# Altium PCB 28Pin_PCB.PcbDoc (part 1 of 2)
Units mm, origin at the board's own origin, x right, y up, seen from the top; angles counter-clockwise.
Board outline 68.58 x 53.34 mm, 2 copper layers (Top Layer, Bottom Layer); 103 components, 71 nets, 321 pads, 0 vias.
Unrouted connection lines stored in the file: 209.
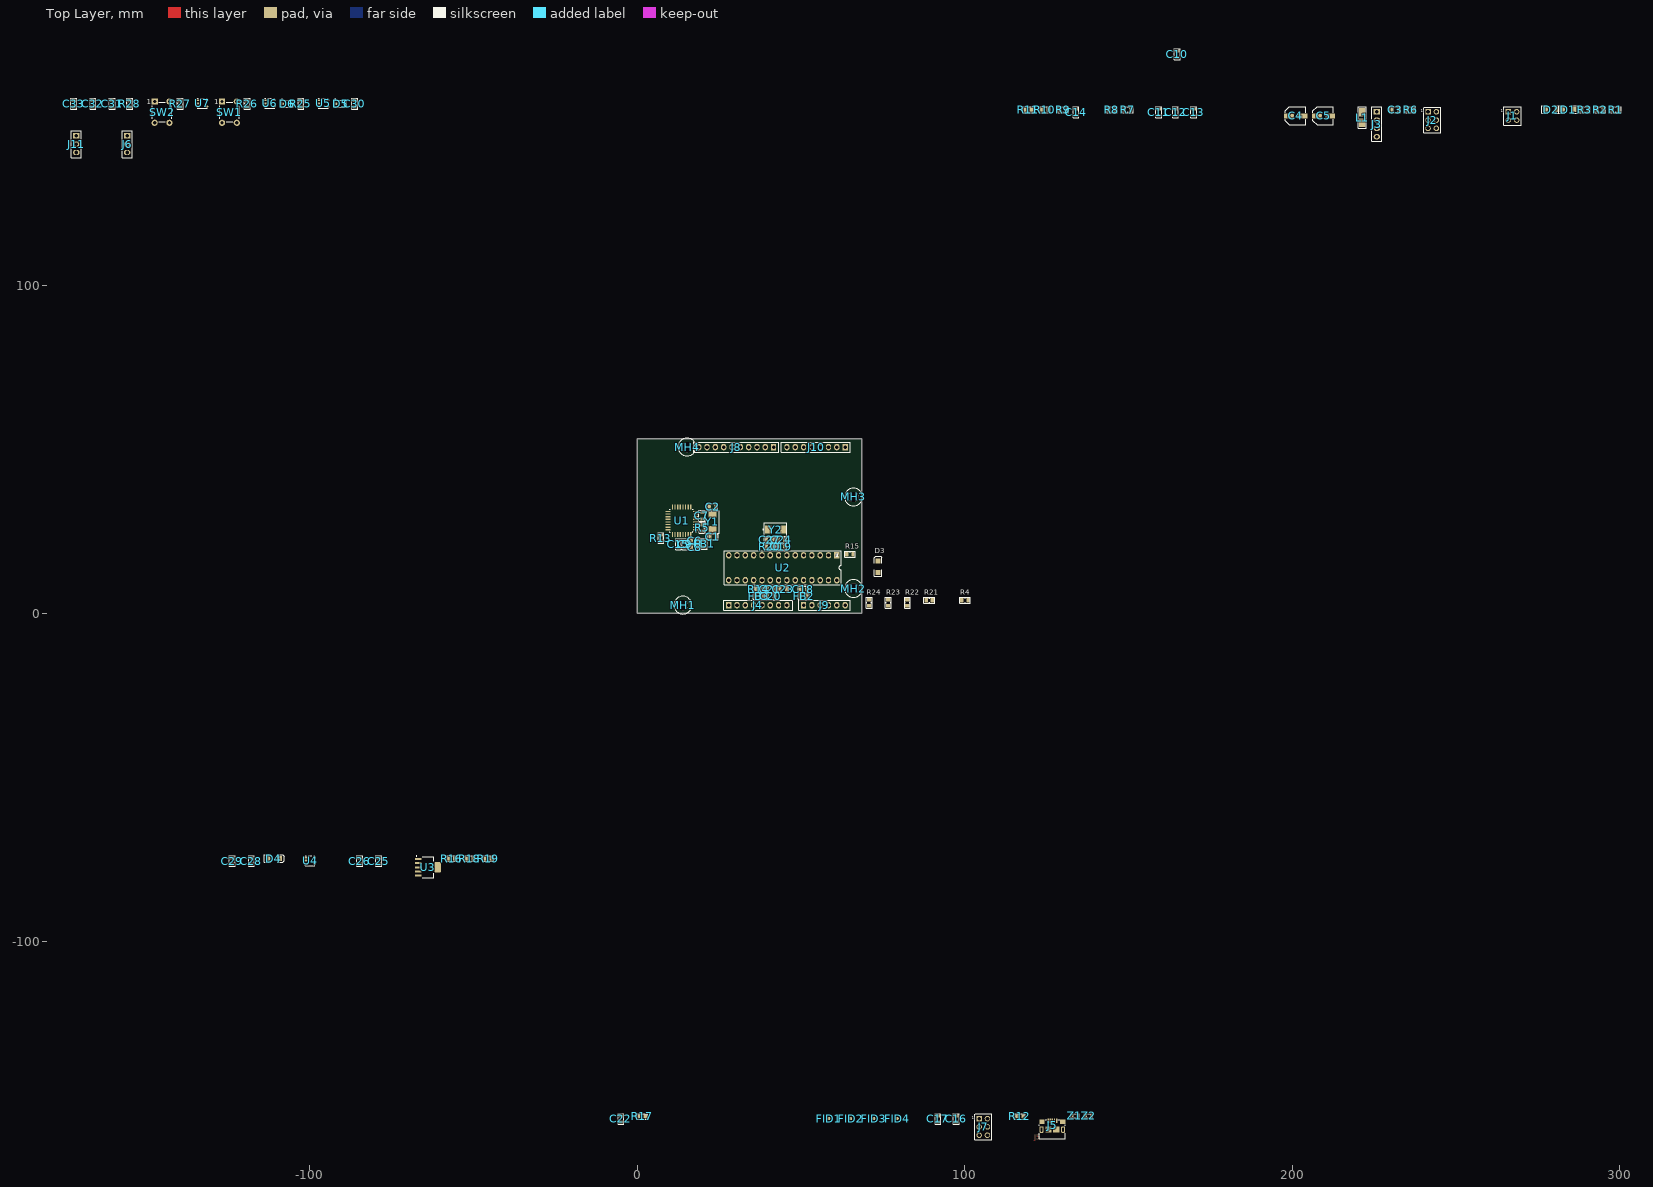
[diagram p0: Top Layer view]
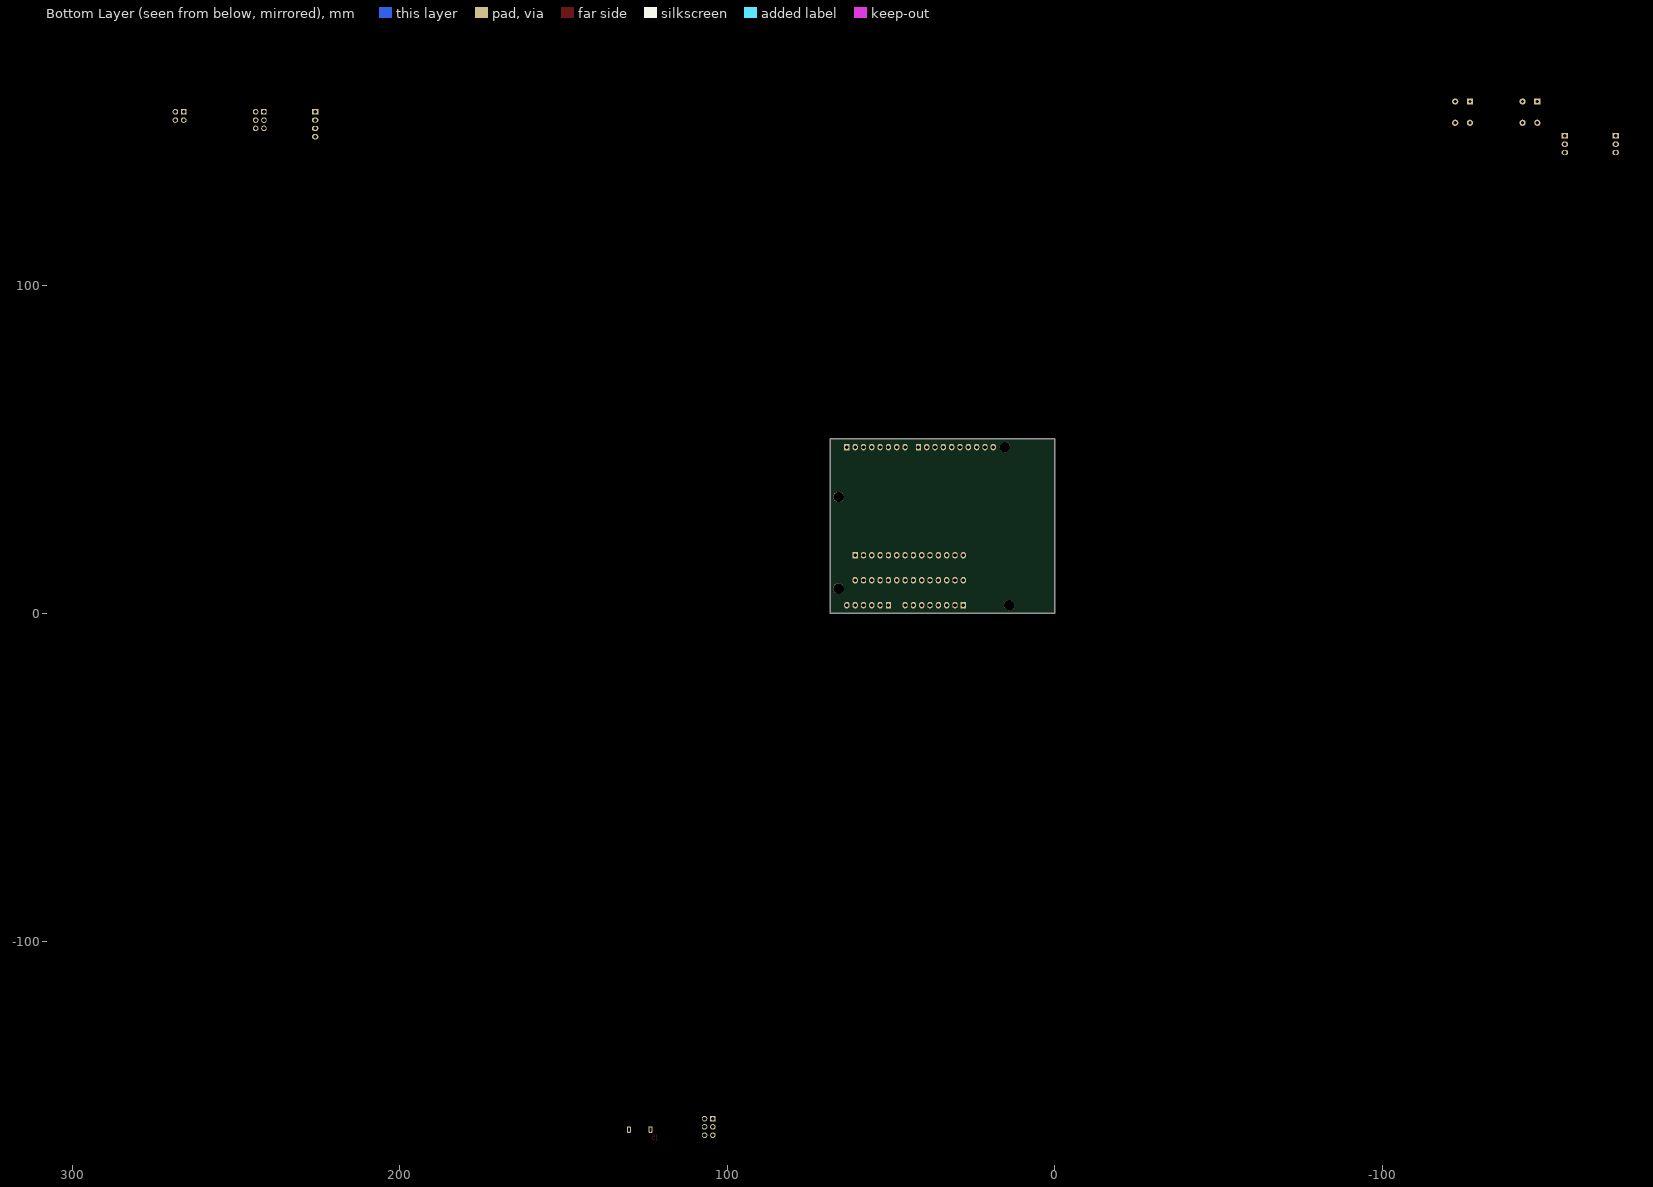
[diagram p1: Bottom Layer view, seen from below]

## Layer stack, top to bottom
Top Solder: solder mask 0.0102, Solder Resist, Dk 3.5
Top Layer: signal copper 0.0356
Dielectric 1: dielectric 0.32, FR-4, Dk 4.8
Bottom Layer: signal copper 0.0356
Bottom Solder: solder mask 0.0102, Solder Resist, Dk 3.5

## Board outline
0,0 68.58,0 68.58,53.34 0,53.34

## Design rules (kind name [scope] priority, off if disabled: settings)
Clearance [All] p1: gap=0.254 ignorepadtopadclearanceinfootprint=FALSE except(0: Arc-Hole Track-Hole SMDPad-Hole THPad-Hole Via-Hole Fill-Hole Poly-Hole Region-Hole Text-Hole)
PolygonConnect [All] p1: connectstyle=Relief reliefconductorwidth=0.254 reliefentries=4 polygonreliefangle="90 Angle" airgapwidth=0.254
RoutingVias [All] p1: holewidth=0.711 width=1.27 viastyle="Through Hole" minholewidth=0.711 minwidth=1.27 maxholewidth=0.711 maxwidth=1.27
SolderMaskExpansion [All] p1: expansion=0.102 istentingtop=FALSE
Width [All] p1: maxlimit=0.254 minlimit=0.254 preferedwidth=0.254
30 further rules are at their usual default settings.

## Components (designator, comment, footprint, x,y, rotation, side; value= is the part's Value field where it differs from the comment)
C1 "18pF 50V" C0805 23.14,23.37 r0 top
C2 "18pF 50V" C0805 23.01,32.58 r0 top
C3 "CER 0.1uF 0805" C0805 231.394,153.797 r0 top
C4 "100uF 10V" C_ALUMINIUM_100u 201.041,151.892 r0 top
C5 "100uF 10V" C_ALUMINIUM_100u 209.55,151.892 r0 top
C6 "CER 0.1uF 0805" C0805 17.6,22.22 r0 top
C7 "CER 0.1uF 0805" C0805 19.76,29.8 r270 top
C8 "CAP 10uF 16V" C0805_10uF 17.6,20.16 r0 top
C9 "CER 0.1uF 0805" C0805 14.72,21.15 r90 top
C10 "CER 0.1uF 0805" C0805 164.846,170.688 r90 top
C11 "CER 0.1uF 0805" C0805 159.258,153.035 r90 top
C12 "CER 0.1uF 0805" C0805 164.338,153.035 r90 top
C13 "CAP 10uF 16V" C0805_10uF 169.926,153.035 r90 top
C14 "CER 0.1uF 0805" C0805 133.985,153.035 r90 top
C15 "1uF CER" C0805 12.62,21.14 r90 top
C16 "CER 0.1uF 0805" C0805 97.409,-154.305 r90 top
C17 "CAP 10uF 16V" C0805_10uF 91.821,-154.305 r90 top
C18 "CAP 10uF 16V" C0805_10uF 50.78,7.35 r0 top
C19 "CER 0.1uF 0805" C0805 44.04,20.42 r0 top
C20 "CAP 10uF 16V" C0805_10uF 40.76,5.28 r180 top
C21 "CER 0.1uF 0805" C0805 40.7,7.36 r180 top
C22 "CER 0.1uF 0805" C0805 -4.953,-154.305 r90 top
C23 "CER 0.1uF 0805" C0805 44.61,7.36 r180 top
C24 "18pF 50V" C0805 44.05,22.48 r180 top
C25 "CAP 10uF 16V" C0805_10uF -78.867,-75.565 r90 top
C26 "CAP 10uF 16V" C0805_10uF -84.709,-75.565 r90 top
C27 "18pF 50V" C0805 40.43,22.45 r180 top
C28 "CER 0.1uF 0805" C0805 -117.729,-75.565 r90 top
C29 "CER 0.1uF 0805" C0805 -123.571,-75.565 r90 top
C30 "CER 0.1uF 0805" C0805 -86.233,155.575 r90 top
C31 "CER 0.1uF 0805" C0805 -160.274,155.575 r90 top
C32 "CER 0.1uF 0805" C0805 -166.116,155.575 r90 top
C33 "CER 0.1uF 0805" C0805 -171.958,155.575 r90 top
D1 "LED2" 3.2X1.6X1.1 284.226,153.797 r0 top
D2 "LED2" 3.2X1.6X1.1 279.019,153.797 r0 top
D3 "LED2" 3.2X1.6X1.1 73.56,14.31 r90 top
D4 "LED2" 3.2X1.6X1.1 -110.871,-74.803 r0 top
D5 "BAT54HT1G" SOD323_DIODE -90.551,155.575 r0 top
D6 "BAT54HT1G" SOD323_DIODE -106.807,155.575 r0 top
FB1 "MPZ2012S601AT000" C0805 20.47,21.26 r90 top
FB2 "MPZ2012S601AT000" C0805 50.83,5.3 r0 top
FB3 "MPZ2012S601AT000" C0805 37.14,5.23 r0 top
FID1 "FID_1MMC" FID_40x120MM 58.547,-154.178 r0 top
FID2 "FID_1MMC" FID_40x120MM 65.151,-154.178 r90 top
FID3 "FID_1MMC" FID_40x120MM 72.263,-154.178 r90 top
FID4 "FID_1MMC" FID_40x120MM 79.375,-154.178 r90 top
J1 "HDR 2x2" HDR_2x2_2.54MM 267.208,150.622 r0 top
J2 "HDR 2x3" HDR_2x3_2.54MM 242.697,150.622 r0 top
J3 "HDR_MALE_1x4" HDR_MALE_1x4 225.806,153.162 r0 top
J4 "HDR FEMALE 1x8" HDR_FEMALE_1x8 27.94,2.54 r90 top locked
J5 "10118193-0001LF" USB_micro 126.746,-156.21 r0 top
J6 "MALE_HDR_1x3" HDR_MALE_1x3 -155.702,145.796 r0 top
J7 "HDR 2x3" HDR_2x3_2.54MM 105.664,-156.718 r0 top
J8 "HDR FEMALE 1x10 2.54mm" HDR_FEMALE_1x10 41.656,50.8 r270 top locked
J9 "HDR FEMALE 1x6" HDR_FEMALE_1x6 50.8,2.54 r90 top locked
J10 "HDR FEMALE 1x8" HDR_FEMALE_1x8 63.5,50.8 r270 top locked
J11 "MALE_HDR_1x3" HDR_MALE_1x3 -171.196,145.796 r0 top
L1 "2u2 / 2A" CL10INDUCTOR 221.361,151.384 r90 top
MH1 "MH_7.4_3.3MM" MH_7.4MM_3.2MMDRILL_NOPT 13.97,2.54 r0 top locked
MH2 "MH_7.4_3.3MM" MH_7.4MM_3.2MMDRILL_NOPT 66.04,7.62 r0 top locked
MH3 "MH_7.4_3.3MM" MH_7.4MM_3.2MMDRILL_NOPT 66.04,35.56 r0 top locked
MH4 "MH_7.4_3.3MM" MH_7.4MM_3.2MMDRILL_NOPT 15.24,50.8 r0 top locked
R1 "100K" RESC2012X65N 298.704,153.797 r0 top
R2 "560R 0805" RESC2012X65N 294.005,153.797 r0 top
R3 "560R 0805" RESC2012X65N 289.306,153.797 r0 top
R4 "10K" RESC2012X65N 100.075,4.036 r0 top
R5 "1MOhm" RESC2012X65N 19.8,26.13 r270 top
R6 "22R" RESC2012X65N 236.093,153.797 r0 top
R7 "22R" RESC2012X65N 149.733,153.797 r0 top
R8 "1K" RESC2012X65N 144.907,153.797 r0 top
R9 "0R" RESC2012X65N 130.048,153.797 r0 top
R10 "22R" RESC2012X65N 124.46,153.797 r0 top
R11 "1K" RESC2012X65N 119.38,153.797 r0 top
R12 "1K" RESC2012X65N 116.84,-153.543 r0 top
R13 "0R" RESC2012X65N 7.26,23.03 r90 top
R14 "22R" RESC2012X65N 37.14,7.33 r180 top
R15 "10K" RESC2012X65N 64.97,18.04 r0 top
R16 "560R 0805" RESC2012X65N -56.642,-74.803 r0 top
R17 "560R 0805" RESC2012X65N 1.524,-153.543 r0 top
R18 "0R" RESC2012X65N -51.054,-74.803 r0 top
R19 "0R" RESC2012X65N -45.466,-74.803 r0 top
R20 "1MOhm" RESC2012X65N 40.45,20.44 r0 top
R21 "10K" RESC2012X65N 89.155,4.036 r0 top
R22 "10K" RESC2012X65N 82.525,3.276 r90 top
R23 "10K" RESC2012X65N 76.675,3.276 r90 top
R24 "10K" RESC2012X65N 70.825,3.276 r90 top
R25 "560R 0805" RESC2012X65N -102.616,155.575 r90 top
R26 "22R" RESC2012X65N -118.999,155.575 r90 top
R27 "22R" RESC2012X65N -139.446,155.575 r90 top
R28 "22R" RESC2012X65N -154.94,155.575 r90 top
SW1 "1825910-6" "SW_ 1825910-6" -124.46,153.035 r0 top
SW2 "1825910-6" "SW_ 1825910-6" -145.034,153.035 r0 top
U1 "ATMEGA16U2-AU" TQFP32 13.58,28.34 r180 top
U2 "ATMEGA328P-PU" DIP28_328P 60.96,17.78 r270 top locked
U3 "TL1963A-33DCQR" SOT127P706X180-6N -63.881,-77.47 r0 top
U4 "SN74AHC1G09DBVR" DBV_SOP_23_5 -99.822,-75.438 r0 top
U5 "SN74AHC1G09DBVR" DBV_SOP_23_5 -95.758,155.702 r0 top
U6 "SN74AHC1G09DBVR" DBV_SOP_23_5 -112.141,155.702 r0 top
U7 "SN74AHC1G09DBVR" DBV_SOP_23_5 -132.715,155.702 r0 top
Y1 "ECS-160-S-23A-EN-TR" CRYSTAL_16MHz 22.85,28.12 r270 top
Y2 "ECS-160-S-23A-EN-TR" XTAL_ECS-160-S-23A-EN-TR 42.24,25.62 r0 top
Z1 "CG0603MLU-05E" R0603 133.604,-153.289 r0 top
Z2 "CG0603MLU-05E" R0603 137.795,-153.289 r0 top

## Footprints (in the part's own frame and the unit in brackets; to place one, negate y for a bottom-side part, rotate by r counter-clockwise, add the part's x,y. Pads: shape width x height; smd on the part's side, far side on the other; paste and mask are expansions set on the pad)
3.2X1.6X1.1 [mm] "SMT LED; 2 Flat Leads"
  rect 1.5x1.5 smd: 1(-1.75,0) 2(1.75,0)
  silkscreen extent -2.9,-1.15 3.2,1.15
C0805 [mm]
  rect 0.9x1.3 smd: 1(-0.95,0) 2(0.95,0)
  silkscreen extent -1.65,-0.89 1.65,0.89, body extent -0.98,-0.6 1.02,0.6, height 0.96
C0805_10uF [mm]
  rect 0.9x1.3 smd: 1(-0.95,0) 2(0.95,0)
  silkscreen extent -1.65,-0.89 1.65,0.89, body extent -1.05,-0.65 0.95,0.55, height 1.46
C_ALUMINIUM_100u [mm]
  rect 3x1.6 smd: 1(-2.05,0) 2(2.05,0)
  silkscreen extent -3.25,-2.75 3,2.75, body extent -3.15,-2.55 2.75,2.75, height 5.41
CL10INDUCTOR [mm]
  rect 2.7x2 smd: 1(-1.6,0) 2(1.6,0)
  silkscreen extent -3.25,-1.25 3.25,1.25, body extent -1.95,-1.2 1.45,1.5, height 2.67
CRYSTAL_16MHz [mm]
  rect 1.9x2.4 smd: 1(-2.123,0.147) 2(2.377,0.147)
  silkscreen extent -3.78,-1.89 3.56,2.18, body extent -2.87,-1.6 3.13,1.9, height 1.11
DBV_SOP_23_5 [mm]
  rect 1x0.55 smd: 1(-1.35,0.95)
  oval 1x0.55 smd: 2(-1.35,0) 3(-1.35,-0.95) 4(1.35,-0.95) 5(1.35,0.95)
  silkscreen extent -1.55,-1.55 1.45,1.55, body extent -1.45,-1.46 1.35,1.44, height 1.44
DIP28_328P [mm]
  rect 2x1.6 hole 1.1: 1(0,0)
  oval 2x1.6 hole 1.1: 2(0,-2.54) 3(0,-5.08) 4(0,-7.62) 5(0,-10.16) 6(0,-12.7) 7(0,-15.24) 8(0,-17.78) 9(0,-20.32) 10(0,-22.86) 11(0,-25.4) 12(0,-27.94) 13(0,-30.48) 14(0,-33.02) 15(7.62,-33.02) 16(7.62,-30.48) 17(7.62,-27.94) 18(7.62,-25.4) 19(7.62,-22.86) 20(7.62,-20.32) 21(7.62,-17.78) 22(7.62,-15.24) 23(7.62,-12.7) 24(7.62,-10.16) 25(7.62,-7.62) 26(7.62,-5.08) 27(7.62,-2.54) 28(7.62,0)
  Bottom Layer circle w0.254: c0,0 r0.597
  silkscreen extent -1.39,-34.31 9.01,1.27, body extent -0.15,-34.42 7.72,1.52, height 4.65
FID_40x120MM [mil]
  round 40 smd paste-40 mask+40: 1(0,0)
HDR_2x2_2.54MM [mm]
  rect 1.7x1.7 hole 1.1: 1(-1.27,2.54)
  round 1.7 hole 1.1: 2(1.27,2.54) 3(-1.27,0) 4(1.27,0)
  silkscreen extent -2.67,-1.52 2.67,4.06, body extent -2.54,-1.27 2.54,3.81, height 8.05
HDR_2x3_2.54MM [mm]
  rect 1.7x1.7 hole 1.1: 1(-1.27,2.54)
  round 1.7 hole 1.1: 2(1.27,2.54) 3(-1.27,0) 4(1.27,0) 5(-1.27,-2.54) 6(1.27,-2.54)
  silkscreen extent -2.54,-3.94 2.54,3.94, body extent -2.64,-3.9 2.44,3.72, height 2.58
HDR_FEMALE_1x6 [mm]
  rect 2x1.6 hole 1.1: 1(0,0)
  oval 2x1.6 hole 1.1: 2(0,-2.54) 3(0,-5.08) 4(0,-7.62) 5(0,-10.16) 6(0,-12.7)
  silkscreen extent -1.52,-14.22 1.52,1.52, body extent -1.18,-14.25 1.32,1.39, height 8.51
HDR_FEMALE_1x8 [mm]
  rect 2x1.6 hole 1.1: 1(0,0)
  oval 2x1.6 hole 1.1: 2(0,-2.54) 3(0,-5.08) 4(0,-7.62) 5(0,-10.16) 6(0,-12.7) 7(0,-15.24) 8(0,-17.78)
  silkscreen extent -1.52,-19.56 1.52,1.52, body extent -1.27,-19.25 1.23,1.47, height 8.51
HDR_FEMALE_1x10 [mm]
  rect 2x1.6 hole 1.1: 1(0,0)
  oval 2x1.6 hole 1.1: 2(0,-2.54) 3(0,-5.08) 4(0,-7.62) 5(0,-10.16) 6(0,-12.7) 7(0,-15.24) 8(0,-17.78) 9(0,-20.32) 10(0,-22.86)
  silkscreen extent -1.52,-24.38 1.52,1.52, body extent -1.27,-24.33 1.23,1.47, height 8.51
HDR_MALE_1x3 [mm]
  rect 2x1.6 hole 1.1: 1(0,0)
  oval 2x1.6 hole 1.1: 2(0,-2.54) 3(0,-5.08)
  silkscreen extent -1.52,-6.72 1.52,1.52, body extent -1.2,-6.31 1.34,1.31, height 8.65
HDR_MALE_1x4 [mm]
  rect 2x1.6 hole 1.1: 1(0,0)
  oval 2x1.6 hole 1.1: 2(0,-2.54) 3(0,-5.08) 4(0,-7.62)
  silkscreen extent -1.52,-9 1.52,1.52, body extent -1.3,-8.78 1.24,1.38, height 8.47
MH_7.4MM_3.2MMDRILL_NOPT [mm]
  round 3.2 hole 3.2 unplated: 1(0,0)
  silkscreen extent -2.7,-2.7 2.7,2.7
R0603 [mm]
  rect 0.6x0.9 smd: 1(-0.75,0) 2(0.75,0)
  silkscreen extent -1.3,-0.65 1.3,0.65, body extent -0.8,-0.44 0.8,0.4, height 0.75
RESC2012X65N [mm]
  rect 1.01x1.38 smd: 1(-0.95,0) 2(0.95,0)
  silkscreen extent -1.66,-0.9 1.65,0.89, body extent -1,-0.62 1,0.62, height 0.63
SOD323_DIODE [mil]
  rect 22x27 smd: 1(-48,0) 2(48,0)
  silkscreen extent -75,-39 75,63, body extent -51,-26 51,27, height 43
SOT127P706X180-6N [mm]
  rrect25% 1.97x0.62 smd: 1(-3.005,2.54) 2(-3.005,1.27) 3(-3.005,0) 4(-3.005,-1.27) 5(-3.005,-2.54)
  rrect25% 1.97x3.16 smd: 6(3.005,0)
  silkscreen extent -3.6,-3.25 1.75,3.5, body extent -3.53,-3.25 3.53,3.25, height 1.66
"SW_ 1825910-6" [mm]
  round 1.9 hole 1: 1(2.25,3.25) 2(2.25,-3.25) 4(-2.25,-3.25)
  rect 1.9x1.9 hole 1: 3(-2.25,3.25)
  silkscreen extent -3,-3 3,3, body extent -2.99,-3.9 3,3.9, height 5.02
TQFP32 [mm]
  rect 1.5x0.4 smd: 1(-4.2,2.8) 2(-4.2,2) 3(-4.2,1.2) 4(-4.2,0.4) 5(-4.2,-0.4) 6(-4.2,-1.2) 7(-4.2,-2) 8(-4.2,-2.8) 17(4.2,-2.8) 18(4.2,-2) 19(4.2,-1.2) 20(4.2,-0.4) 21(4.2,0.4) 22(4.2,1.2) 23(4.2,2) 24(4.2,2.8)
  rect 0.4x1.5 smd: 9(-2.8,-4.2) 10(-2,-4.2) 11(-1.2,-4.2) 12(-0.4,-4.2) 13(0.4,-4.2) 14(1.2,-4.2) 15(2,-4.2) 16(2.8,-4.2) 25(2.8,4.2) 26(2,4.2) 27(1.2,4.2) 28(0.4,4.2) 29(-0.4,4.2) 30(-1.2,4.2) 31(-2,4.2) 32(-2.8,4.2)
  silkscreen extent -4.5,-3.55 3.62,3.6, body extent -4.6,-4.6 4.6,4.6, height 1.2
USB_micro [mm]
  rect 0.4x1.35 smd mask+0.05: 1(-1.3,1.338) 2(-0.65,1.338) 3(0,1.338) 4(0.65,1.338) 5(1.3,1.338)
  rrect50% 1.2x2 hole 0.5 slot 1.2 at 90 deg mask+0.05: 4(3.3,-1.338) 8(-3.3,-1.338)
  rect 1.6x1.4 smd: 6(-3.2,1.112) 7(3.2,1.112)
  rect 1.9x1.9 smd mask+0.05: 10(-1.2,-1.338) 11(1.2,-1.338)
  silkscreen extent -3.95,-4.11 3.9,1.74, body extent -6,-4.07 3.93,3.64, height 3.53
XTAL_ECS-160-S-23A-EN-TR [mm]
  rect 1.9x2.4 smd: 1(-2.25,0) 2(2.25,0)
  silkscreen extent -3.91,-2.03 3.43,2.03, body extent -3,-1.75 3,1.75, height 1.11

## Part data
C1 C2 C24 C27: library part C0805C180K5GACTU, "KEMET - C0805C180K5GACTU - SMD Multilayer Ceramic Capacitor, 18 pF, 50 V, 0805 [2012 Metric], ± 10%, C0G / NP0, C Series KEMET", Capacitance=18pF, Case Code (Imperial)=0805, Case Code (Metric)=2012, Dielectric=C0G, Dielectric Material=Ceramic, Manufacturer=KEMET, Max Operating Temperature=125°C, Min Operating Temperature=-55°C, Package Quantity=1, Supplier Part Number 1=399-8030-1-ND, Tolerance=10%, Voltage Rating=50V, Case/Package=0805, Category="Ceramic Capacitors", ComponentLink1Description=https://datasheet.ciiva.com/26847/getdatasheetpartid-742486-26847863.pdf?src-supplier=Verical, ComponentLink1URL=https://datasheet.ciiva.com/26847/getdatasheetpartid-742486-26847863.pdf?src-supplier=Verical, ComponentLink2Description=https://datasheet.ciiva.com/5412/kem-c1003-c0g-smd-356956-5412921.pdf?src-supplier=Mouser, ComponentLink2URL=https://datasheet.ciiva.com/5412/kem-c1003-c0g-smd-356956-5412921.pdf?src-supplier=Mouser, Contact Plating=Tin,Matte, Depth=1.25mm, Dissipation Factor=0.1%, Height=0.78mm, Lead Free="Lead Free", Lead Pitch=0.75mm, Length=2mm, Manufacturer Part Number=C0805C180K5GACTU, Mount="Surface Mount", Packaging="Tape and Reel", Pricing 1="1=0.11000, 10=0.08200, 50=0.04480, 100=0.03660, 500=0.02616, 1000=0.02056 (USD)", Radiation Hardening=No, REACH SVHC="No SVHC", RoHS=Yes, Stock 1=32076, Supplier 1=Digi-Key, Termination=SMD/SMT, Thickness=0.035inch, Voltage Rating (DC)=50V, Width=0.049inch
C3 C6 C7 C9 C10 C11 C12 C14 C16 C19 C21 C22 C23 C28 C29 C30 C31 C32 C33: library part CGA4J2X7R1H104K125AE, "CAP CER 0.1UF 50V X7R 0805", Capacitance=100nF, Case Code (Imperial)=0805, Case Code (Metric)=2012, Manufacturer=TDK, Max Operating Temperature=125°C, Min Operating Temperature=-55°C, Package Quantity=1, Ratings=AEC-Q200, Supplier Part Number 1=445-15959-1-ND, Tolerance=10%, Voltage Rating=50V, Case/Package=0805, Category="Ceramic Capacitors", ComponentLink1Description=http://product.tdk.com/en/catalog/datasheets/mlcc_automotive_soft_en.pdf?src-supplier=Avnet, ComponentLink1URL=http://product.tdk.com/en/catalog/datasheets/mlcc_automotive_soft_en.pdf?src-supplier=Avnet, ComponentLink2Description=https://product.tdk.com/info/en/catalog/datasheets/mlcc_automotive_soft_en.pdf?src-supplier=Digi-Key, ComponentLink2URL=https://product.tdk.com/info/en/catalog/datasheets/mlcc_automotive_soft_en.pdf?src-supplier=Digi-Key, ComponentLink3Description=https://product.tdk.com/info/en/catalog/spec/mlccspec_automotive_soft_en.pdf?src-supplier=Digi-Key, ComponentLink3URL=https://product.tdk.com/info/en/catalog/spec/mlccspec_automotive_soft_en.pdf?src-supplier=Digi-Key, Features="Soft Termination", Lead Free="Lead Free", Length=0.079inch, Manufacturer Part Number=CGA4J2X7R1H104K125AE, Mount="Surface Mount", Packaging="Tape and Reel", Pricing 1="1=0.26000, 10=0.18200, 50=0.12100, 100=0.10280, 500=0.07260, 1000=0.06352 (USD)", RoHS=Yes, RoHS Compliant=Yes, Stock 1=29752, Supplier 1=Digi-Key, Thickness=0.057inch, Width=0.049inch
C4 C5: library part EEE-HA1A101P, "CAP ALUM 100UF 20% 10V SMD", Capacitance=100uF, Case/Package=Radial, Leakage Current=10uA, Manufacturer=Panasonic, Max Operating Temperature=105°C, Min Operating Temperature=-40°C, Package Quantity=1, Ripple Current=110mA, Supplier Part Number 1=PCE4168CT-ND, Tolerance=20%, Voltage=10V, Category="Aluminum Electrolytic Capacitors", ComponentLink1Description=https://datasheet.ciiva.com/11777/0900766b8102e3f9-11777443.pdf?src-supplier=RSComponents, ComponentLink1URL=https://datasheet.ciiva.com/11777/0900766b8102e3f9-11777443.pdf?src-supplier=RSComponents, ComponentLink2Description=https://datasheet.ciiva.com/46437/1446029-46437655.pdf?src-supplier=Element14, ComponentLink2URL=https://datasheet.ciiva.com/46437/1446029-46437655.pdf?src-supplier=Element14, ComponentLink3Description=https://datasheet.ciiva.com/2985/aba0000ce3-2985627.pdf?src-supplier=Avnet, ComponentLink3URL=https://datasheet.ciiva.com/2985/aba0000ce3-2985627.pdf?src-supplier=Avnet, ComponentLink4Description=https://datasheet.ciiva.com/17535/aba0000ce3-17535671.pdf?src-supplier=Avnet+Europe, ComponentLink4URL=https://datasheet.ciiva.com/17535/aba0000ce3-17535671.pdf?src-supplier=Avnet+Europe, ComponentLink5Description=https://datasheet.ciiva.com/24240/aba0000ce3-259063-24240487.pdf?src-supplier=Mouser, ComponentLink5URL=https://datasheet.ciiva.com/24240/aba0000ce3-259063-24240487.pdf?src-supplier=Mouser, ComponentLink6Description=https://datasheet.ciiva.com/2985/aba0000ce3-2985626.pdf?src-supplier=Avnet, ComponentLink6URL=https://datasheet.ciiva.com/2985/aba0000ce3-2985626.pdf?src-supplier=Avnet, ComponentLink7Description=https://datasheet.ciiva.com/6134/1446029-6134154.pdf?src-supplier=Farnell, ComponentLink7URL=https://datasheet.ciiva.com/6134/1446029-6134154.pdf?src-supplier=Farnell, ComponentLink8Description=https://datasheet.ciiva.com/14601/70256712-14601962.pdf?src-supplier=Allied+Electronics, ComponentLink8URL=https://datasheet.ciiva.com/14601/70256712-14601962.pdf?src-supplier=Allied+Electronics, Construction=Cylindrical, Contact Plating=Tin, Diameter=8mm, Height=6.2mm, Height - Seated (Max)=0.244inch, Lead Diameter=0.65mm, Lead Free="Lead Free", Lead Pitch=2.2mm, Length=6.5mm, Life (Hours)=2000Hour, Manufacturer Part Number=EEE-HA1A101P, Mount="Surface Mount,PCB", Packaging="Tape and Reel", Pricing 1="1=0.52000, 10=0.36900, 50=0.27880, 100=0.24280, 500=0.17986 (USD)", Radiation Hardening=No, REACH SVHC="No SVHC", Ripple Current (AC)=110mA, RoHS=Yes, RoHS Compliant=Yes, Series=HA, Stock 1=2795, Supplier 1=Digi-Key, Termination=SMD/SMT, Voltage Rating=10V, Voltage Rating (DC)=10V, Width=650um
C8 C13 C17 C18 C20 C25 C26: library part CGA4J1X5R1C106K125AC, "TDK - CGA4J1X5R1C106K125AC - Keramikvielschichtkondensator, SMD, 10 µF, 16 V, 0805 [Metrisch 2012], ± 10%, X5R, Baureihe CGA", Capacitance=10uF, Case Code (Imperial)=0805, Case Code (Metric)=2012, Dielectric=X5R, Manufacturer=TDK, Max Operating Temperature=85°C, Min Operating Temperature=-55°C, Package Quantity=1, Ratings=AEC-Q200, Resistor Type=Ceramic, Supplier Part Number 1=445-7883-1-ND, Tolerance=10%, Voltage Rating=16V, Case/Package=0805, Category="Ceramic Capacitors", ComponentLink1Description=https://datasheet.ciiva.com/24216/cga4j1x5r1c106k125ac-265827-24216314.pdf?src-supplier=Mouser, ComponentLink1URL=https://datasheet.ciiva.com/24216/cga4j1x5r1c106k125ac-265827-24216314.pdf?src-supplier=Mouser, ComponentLink2Description=https://datasheet.ciiva.com/7975/1807242-7975419.pdf?src-supplier=Element14, ComponentLink2URL=https://datasheet.ciiva.com/7975/1807242-7975419.pdf?src-supplier=Element14, Depth=1.25mm, Height=1.25mm, Lead Free="Lead Free", Length=2mm, Manufacturer Part Number=CGA4J1X5R1C106K125AC, Mount="Surface Mount", Packaging="Tape and Reel", Pricing 1="1=0.48000, 10=0.33000, 50=0.23100, 100=0.19800, 500=0.14850, 1000=0.12540 (USD)", REACH SVHC="No SVHC", RoHS=Yes, RoHS Compliant=Yes, Series=CGA, Stock 1=1670, Supplier 1=Digi-Key, Termination=SMD/SMT, Thickness=0.049inch, Voltage Rating (DC)=16V, Weight=0.000194oz, Width=0.049inch
C15: library part CGA4J3X7R1E105M125AB, "CAP CER 1UF 25V X7R 0805", Capacitance=1uF, Case Code (Imperial)=0805, Case Code (Metric)=2012, Dielectric=X7R, Manufacturer=TDK, Max Operating Temperature=125°C, Min Operating Temperature=-55°C, Package Quantity=2000, Ratings=AEC-Q200, Supplier Part Number 1=445-12758-1-ND, Tolerance=20%, Voltage Rating=25V, Case/Package=0805, Category="Ceramic Capacitors", ComponentLink1Description=http://www.mouser.com/ds/2/400/lcc_automotive_general_en-843974.pdf?src-supplier=Mouser, ComponentLink1URL=http://www.mouser.com/ds/2/400/lcc_automotive_general_en-843974.pdf?src-supplier=Mouser, ComponentLink2Description=https://product.tdk.com/info/en/catalog/datasheets/mlcc_automotive_general_en.pdf?src-supplier=Digi-Key, ComponentLink2URL=https://product.tdk.com/info/en/catalog/datasheets/mlcc_automotive_general_en.pdf?src-supplier=Digi-Key, ComponentLink3Description=http://product.tdk.com/en/catalog/datasheets/mlcc_automotive_general_en.pdf?src-supplier=Avnet, ComponentLink3URL=http://product.tdk.com/en/catalog/datasheets/mlcc_automotive_general_en.pdf?src-supplier=Avnet, Height=1.25mm, Length=0.079inch, Manufacturer Part Number=CGA4J3X7R1E105M125AB, Mount="Surface Mount", Packaging="Tape and Reel", Pricing 1="1=0.18000, 10=0.12400, 50=0.07420, 100=0.06270, 500=0.04290, 1000=0.03795 (USD)", RoHS=Yes, RoHS Compliant=Yes, Series=CGA, Stock 1=2888, Supplier 1=Digi-Key, Thickness=0.057inch, Voltage Rating (DC)=25V, Weight=0.000194oz, Width=0.049inch
D1 D2 D3 D4: "Typical RED, GREEN, YELLOW, AMBER GaAs LED", LatestRevisionDate=17-Jul-2002, LatestRevisionNote="Re-released for DXP Platform.", PackageDescription="SM LED; 2 Flat Leads", PackageReference=3.2X1.6X1.1, PackageVersion=Feb-2002, Published=8-Jun-2000, Publisher="Altium Limited"
D5 D6: "Small Signal Schottky Diode, Single, 30 V, 200 mA, 800 mV, 600 mA, 150 C ;RoHS Compliant: Yes", Average Rectified Current=200mA, Capacitance=10pF, Forward Voltage=800mV, Manufacturer="ON Semiconductor / Fairchild", Max Forward Surge Current (Ifsm)=600mA, Max Operating Temperature=150°C, Max Repetitive Reverse Voltage (Vrrm)=30V, Max Reverse Current=2uA, Min Operating Temperature=-55°C, Package Quantity=3000, Power Dissipation=200mW, Supplier Part Number 1=BAT54HT1GOSCT-ND, Category="Schottky Diodes", ComponentLink1Description=https://datasheet.ciiva.com/4452/bat54ht1g-104602-4452889.pdf?src-supplier=Mouser, ComponentLink1URL=https://datasheet.ciiva.com/4452/bat54ht1g-104602-4452889.pdf?src-supplier=Mouser, ComponentLink2Description=https://datasheet.ciiva.com/1240/1747983-1240762.pdf?src-supplier=Newark, ComponentLink2URL=https://datasheet.ciiva.com/1240/1747983-1240762.pdf?src-supplier=Newark, ComponentLink3Description=https://datasheet.ciiva.com/34301/806549-34301562.pdf?src-supplier=Jameco, ComponentLink3URL=https://datasheet.ciiva.com/34301/806549-34301562.pdf?src-supplier=Jameco, ComponentLink4Description=https://datasheet.ciiva.com/30479/0900766b811a63a9-30479442.pdf?src-supplier=RSComponents, ComponentLink4URL=https://datasheet.ciiva.com/30479/0900766b811a63a9-30479442.pdf?src-supplier=RSComponents, ComponentLink5Description=https://datasheet.ciiva.com/4714/bat54ht1-d-72881-4714706.pdf?src-supplier=Mouser, ComponentLink5URL=https://datasheet.ciiva.com/4714/bat54ht1-d-72881-4714706.pdf?src-supplier=Mouser, ComponentLink6Description=https://datasheet.ciiva.com/910/bat54ht1g-910498.pdf?src-supplier=Digi-Key, ComponentLink6URL=https://datasheet.ciiva.com/910/bat54ht1g-910498.pdf?src-supplier=Digi-Key, ComponentLink7Description=https://datasheet.ciiva.com/46429/1727620-46429206.pdf?src-supplier=Element14, ComponentLink7URL=https://datasheet.ciiva.com/46429/1727620-46429206.pdf?src-supplier=Element14, ComponentLink8Description=https://datasheet.ciiva.com/915/bat54ht1-d-915444.pdf?src-supplier=Digi-Key, ComponentLink8URL=https://datasheet.ciiva.com/915/bat54ht1-d-915444.pdf?src-supplier=Digi-Key, ComponentLink9Description=https://datasheet.ciiva.com/910/bat54ht1g-910499.pdf?src-supplier=Digi-Key, ComponentLink9URL=https://datasheet.ciiva.com/910/bat54ht1g-910499.pdf?src-supplier=Digi-Key, ComponentLink10Description=https://datasheet.ciiva.com/8303/bat54ht1g-8303645.pdf?src-supplier=Avnet, ComponentLink10URL=https://datasheet.ciiva.com/8303/bat54ht1g-8303645.pdf?src-supplier=Avnet, ComponentLink11Description=https://datasheet.ciiva.com/1180/bat54ht1-d-1180251.pdf?src-supplier=Element14, ComponentLink11URL=https://datasheet.ciiva.com/1180/bat54ht1-d-1180251.pdf?src-supplier=Element14, ComponentLink12Description=https://datasheet.ciiva.com/1180/bat54ht1-d-1180252.pdf?src-supplier=Element14, ComponentLink12URL=https://datasheet.ciiva.com/1180/bat54ht1-d-1180252.pdf?src-supplier=Element14, ComponentLink13Description=https://datasheet.ciiva.com/8294/bat54ht1-d-8294645.pdf?src-supplier=Avnet, ComponentLink13URL=https://datasheet.ciiva.com/8294/bat54ht1-d-8294645.pdf?src-supplier=Avnet, ComponentLink14Description=https://datasheet.ciiva.com/915/bat54ht1-d-915445.pdf?src-supplier=Digi-Key, ComponentLink14URL=https://datasheet.ciiva.com/915/bat54ht1-d-915445.pdf?src-supplier=Digi-Key, ComponentLink15Description=https://datasheet.ciiva.com/915/bat54ht1-d-915443.pdf?src-supplier=Digi-Key, ComponentLink15URL=https://datasheet.ciiva.com/915/bat54ht1-d-915443.pdf?src-supplier=Digi-Key, ComponentLink16Description=https://datasheet.ciiva.com/910/bat54ht1g-910497.pdf?src-supplier=Digi-Key, ComponentLink16URL=https://datasheet.ciiva.com/910/bat54ht1g-910497.pdf?src-supplier=Digi-Key, ComponentLink17Description=https://datasheet.ciiva.com/17020/bat54ht1g-17020445.pdf?src-supplier=Future+Electronics, ComponentLink17URL=https://datasheet.ciiva.com/17020/bat54ht1g-17020445.pdf?src-supplier=Future+Electronics, ComponentLink18Description=https://datasheet.ciiva.com/48686/001262925-da-01-en-diode-schottky-30v-bat54ht1g-sod-323-fsc-48686266.pdf?src-supplier=Conrad, ComponentLink18URL=https://datasheet.ciiva.com/48686/001262925-da-01-en-diode-schottky-30v-bat54ht1g-sod-323-fsc-48686266.pdf?src-supplier=Conrad, Contact Plating=Tin,Matte, Current Rating=200mA, Element Configuration=Single, Forward Current=200mA, Height=1mm, Lead Free="Lead Free", Length=1.8mm, Manufacturer Part Number=BAT54HT1G, Max Reverse Leakage Current=2uA, Max Reverse Voltage (DC)=30V, Max Surge Current=600mA, Mount="Surface Mount", Number of Pins=2, Output Current=200mA, Packaging="Tape and Reel", Peak Non-Repetitive Surge Current=600mA, Polarity=Standard, Pricing 1="1=0.21000, 10=0.17300, 100=0.09180, 500=0.06042, 1000=0.04109 (USD)", Radiation Hardening=No, REACH SVHC="No SVHC", Recovery Time=5ns, Reverse Recovery Time=5ns, Reverse Voltage=30V, RoHS=Yes, RoHS Compliant=Yes, Supplier 1=Digi-Key, Voltage Rating (DC)=30V, Width=1.35mm
FB1 FB2 FB3: "FERRITE BEAD 600 OHM 0805 1LN", Case Code (Imperial)=0805, Case Code (Metric)=2012, Current Rating=2A, DC Resistance (DCR)=100mR, Manufacturer=TDK, Package Quantity=1, Supplier Part Number 1=445-2206-1-ND, Case/Package=0805, Category="Ferrite Beads and Chips", ComponentLink1Description=https://datasheet.ciiva.com/46634/beads-commercial-power-mpz-en-46634377.pdf?src-supplier=Digi-Key, ComponentLink1URL=https://datasheet.ciiva.com/46634/beads-commercial-power-mpz-en-46634377.pdf?src-supplier=Digi-Key, ComponentLink2Description=https://datasheet.ciiva.com/46634/beads-commercial-power-mpz-en-46634606.pdf?src-supplier=Digi-Key, ComponentLink2URL=https://datasheet.ciiva.com/46634/beads-commercial-power-mpz-en-46634606.pdf?src-supplier=Digi-Key, ComponentLink3Description=https://datasheet.ciiva.com/46634/beads-commercial-power-mpz-en-46634335.pdf?src-supplier=Digi-Key, ComponentLink3URL=https://datasheet.ciiva.com/46634/beads-commercial-power-mpz-en-46634335.pdf?src-supplier=Digi-Key, Height=0.041inch, Impedance=600R, Lead Free="Lead Free", Length=0.079inch, Manufacturer Part Number=MPZ2012S601AT000, Max DC Current=2A, Mount="Surface Mount", Packaging="Tape and Reel", Pricing 1="1=0.11000, 10=0.09200, 25=0.08240, 50=0.06040, 100=0.05220, 250=0.04116, 500=0.03476, 1000=0.02928 (USD)", REACH SVHC="No SVHC", RoHS=Yes, RoHS Compliant=Yes, Series=MPZ, Supplier 1=Digi-Key, Width=0.049inch
FID1 FID2 FID3 FID4: library part FID_1MM, "Fiducial 40mil dia, 120mil mask"
J1: library part M20-9980245, "02+02 DIL Vert Pin Hdr", Color=Black, Contact Resistance=25mR, Manufacturer=Harwin, Max Current Rating=3A, Max Operating Temperature=105°C, Min Operating Temperature=-40°C, Category="Headers and Wire Housings", ComponentLink1Description=https://datasheet.ciiva.com/26899/getdatasheetpartid-721707-26899431.pdf?src-supplier=Verical, ComponentLink1URL=https://datasheet.ciiva.com/26899/getdatasheetpartid-721707-26899431.pdf?src-supplier=Verical, ComponentLink2Description=https://datasheet.ciiva.com/6814/m20-998-6814779.pdf?src-supplier=Digi-Key, ComponentLink2URL=https://datasheet.ciiva.com/6814/m20-998-6814779.pdf?src-supplier=Digi-Key, Connector Type="Male Pin", Contact Material=Brass, Contact Mating Length=0.24inch, Contact Plating=Gold, Contact Type="Male Pin", Depth=5.08mm, Gender=Male, Housing Color=Black, Housing Material=Nylon, Length=5.08mm, Manufacturer Part Number=M20-9980245, Mount="Through Hole", Number of Contacts=4, Number of Positions=4, Number of Rows=2, Orientation=Straight, Packaging=Bulk, Pitch=2.54mm, Pricing 1="1=0.25000, 10=0.23500, 100=0.16280, 500=0.13776, 1000=0.11272, 5000=0.10019, 10000=0.09080 (USD)", Radiation Hardening=No, RoHS=Yes, RoHS Compliant=Yes, Row Spacing=0.1inch, Series=M20, Stock 1=10856, Termination=Solder, Weight=0.008395oz
J2 J7: library part M20-9980346, "Conn Unshrouded Header HDR 6 POS 2.54mm Solder ST Thru-Hole Bag", Color=Black, Contact Resistance=25mR, Current Rating=3A, Insulation Resistance=10GR, Manufacturer=Harwin, Max Operating Temperature=105°C, Min Operating Temperature=-40°C, Package Quantity=1000, Category="Headers and Wire Housings", ComponentLink1Description=https://datasheet.ciiva.com/11745/0900766b81034e61-11745752.pdf?src-supplier=RSComponents, ComponentLink1URL=https://datasheet.ciiva.com/11745/0900766b81034e61-11745752.pdf?src-supplier=RSComponents, ComponentLink2Description=https://datasheet.ciiva.com/26899/getdatasheetpartid-483857-26899433.pdf?src-supplier=Verical, ComponentLink2URL=https://datasheet.ciiva.com/26899/getdatasheetpartid-483857-26899433.pdf?src-supplier=Verical, ComponentLink3Description=https://datasheet.ciiva.com/8046/112195-8046906.pdf?src-supplier=Element14, ComponentLink3URL=https://datasheet.ciiva.com/8046/112195-8046906.pdf?src-supplier=Element14, Connector Type="Male Pin", Contact Material=Bronze,Brass, Contact Mating Length=0.24inch, Contact Plating=Tin, Depth=5.08mm, Gender=Male, Housing Color=Black, Housing Material=Nylon, Length=7.62mm, Manufacturer Part Number=M20-9980346, Max Current Rating=3A, Mount="Through Hole", Number of Contacts=6, Number of Positions=6, Number of Rows=2, Orientation=Straight, Packaging=Bag, Pitch=2.54mm, Pricing 1="1=0.26000, 10=0.24200, 100=0.16810, 500=0.14220, 1000=0.11635, 5000=0.10342, 10000=0.09373 (USD)", Radiation Hardening=No, REACH SVHC="No SVHC", RoHS=Yes, Row Spacing=0.1inch, Stock 1=30003, Termination=Solder
J3: library part M20-8890445, "4 Way Sil Horiz Smt P/hdr Rohs Compliant: Yes", Manufacturer=Harwin, Category=Connectors, ComponentLink1Description=https://cdn.harwin.com/pdfs/Harwin_PC_Connectors_M20.pdf?src-supplier=Digi-Key, ComponentLink1URL=https://cdn.harwin.com/pdfs/Harwin_PC_Connectors_M20.pdf?src-supplier=Digi-Key, Manufacturer Part Number=M20-8890445, Pricing 1="1=0.54000, 10=0.50300, 100=0.38560, 500=0.33532, 1000=0.27664, 5000=0.24311, 10000=0.22634 (USD)", RoHS=Yes, RoHS Compliant=Yes, Stock 1=2537
J4 J10: library part M20-7821046, "HARWIN - M20-7821046 - Board-To-Board Connector, M20 Series, Through Hole, Receptacle, 10, 2.54 mm, Tin Plated Contacts", Case/Package=SIL, Color=Black, Contact Resistance=20mR, Current Rating=3A, Insulation Resistance=1MR, Manufacturer=Harwin, Max Operating Temperature=105°C, Min Operating Temperature=-40°C, Package Quantity=23, Category="Headers and Wire Housings", ComponentLink1Description=https://datasheet.ciiva.com/26899/getdatasheetpartid-559226-26899379.pdf?src-supplier=Verical, ComponentLink1URL=https://datasheet.ciiva.com/26899/getdatasheetpartid-559226-26899379.pdf?src-supplier=Verical, ComponentLink2Description=https://datasheet.ciiva.com/11753/0900766b80dc1d2b-11753869.pdf?src-supplier=RSComponents, ComponentLink2URL=https://datasheet.ciiva.com/11753/0900766b80dc1d2b-11753869.pdf?src-supplier=RSComponents, ComponentLink3Description=https://datasheet.ciiva.com/6785/m20-782-6785605.pdf?src-supplier=Digi-Key, ComponentLink3URL=https://datasheet.ciiva.com/6785/m20-782-6785605.pdf?src-supplier=Digi-Key, ComponentLink4Description=https://datasheet.ciiva.com/10151/m20-782-10151366.pdf?src-supplier=Avnet, ComponentLink4URL=https://datasheet.ciiva.com/10151/m20-782-10151366.pdf?src-supplier=Avnet, ComponentLink5Description=https://datasheet.ciiva.com/16732/m20-782-16732152.pdf?src-supplier=Avnet+Europe, ComponentLink5URL=https://datasheet.ciiva.com/16732/m20-782-16732152.pdf?src-supplier=Avnet+Europe, Connector Type=Receptacle,Socket, Contact Gender=Female, Contact Material=Bronze, Contact Plating=Tin, Depth=2.5mm, Gender=Receptacle, Hole Diameter=0.8mm, Housing Color=Black, Housing Material=Polyamide, Lead Pitch=2.54mm, Length=25.8mm, Manufacturer Part Number=M20-7821046, Mating Cycles=50, Max Current Rating=3A, Mount="Through Hole", Number of Contacts=10, Number of Positions=10, Number of Rows=1, Orientation=Straight, Packaging=Rail/Tube, Pitch=2.54mm, Pricing 1="1=1.29000, 10=1.13300, 100=0.97770, 500=0.79992, 1000=0.71104, 5000=0.62216, 10000=0.59105 (USD)", Radiation Hardening=No, REACH SVHC="No SVHC", RoHS=Yes, Stock 1=664, Termination=Solder
J5: "CONN USB MICRO B RECPT SMT R/A", Manufacturer="Amphenol ICC / FCI", Supplier Part Number 1=609-4616-1-ND, Category="USB Connectors", ComponentLink1Description=http://components.arrow.com/part/dataview/0323_04107372?src-supplier=Arrow+Europe, ComponentLink1URL=http://components.arrow.com/part/dataview/0323_04107372?src-supplier=Arrow+Europe, ComponentLink2Description=http://uk.rs-online.com/webdocs/1450/0900766b814507f1.pdf?src-supplier=RSComponents, ComponentLink2URL=http://uk.rs-online.com/webdocs/1450/0900766b814507f1.pdf?src-supplier=RSComponents, ComponentLink3Description=https://cdn.amphenol-icc.com/media/wysiwyg/files/documentation/datasheet/inputoutput/io_usb_micro.pdf?src-supplier=Avnet, ComponentLink3URL=https://cdn.amphenol-icc.com/media/wysiwyg/files/documentation/datasheet/inputoutput/io_usb_micro.pdf?src-supplier=Avnet, ComponentLink4Description=https://cdn.amphenol-icc.com/media/wysiwyg/files/documentation/datasheet/inputoutput/io_usb_micro.pdf?src-supplier=Arrow+Electronics, ComponentLink4URL=https://cdn.amphenol-icc.com/media/wysiwyg/files/documentation/datasheet/inputoutput/io_usb_micro.pdf?src-supplier=Arrow+Electronics, ComponentLink5Description=https://cdn.amphenol-icc.com/media/wysiwyg/files/documentation/datasheet/inputoutput/io_usb_micro.pdf?src-supplier=Onlinecomponents.com, ComponentLink5URL=https://cdn.amphenol-icc.com/media/wysiwyg/files/documentation/datasheet/inputoutput/io_usb_micro.pdf?src-supplier=Onlinecomponents.com, ComponentLink6Description=https://cdn.amphenol-icc.com/media/wysiwyg/files/documentation/datasheet/inputoutput/io_usb_micro.pdf?src-supplier=Verical, ComponentLink6URL=https://cdn.amphenol-icc.com/media/wysiwyg/files/documentation/datasheet/inputoutput/io_usb_micro.pdf?src-supplier=Verical, ComponentLink7Description=http://www.amphenol-icc.com/media/wysiwyg/files/drawing/10118193.pdf?src-supplier=Digi-Key, ComponentLink7URL=http://www.amphenol-icc.com/media/wysiwyg/files/drawing/10118193.pdf?src-supplier=Digi-Key, ComponentLink8Description=https://cdn.amphenol-icc.com/media/wysiwyg/files/documentation/datasheet/inputoutput/io_usb_micro.pdf?src-supplier=Digi-Key, ComponentLink8URL=https://cdn.amphenol-icc.com/media/wysiwyg/files/documentation/datasheet/inputoutput/io_usb_micro.pdf?src-supplier=Digi-Key, ComponentLink9Description=https://cdn.amphenol-icc.com/media/wysiwyg/files/documentation/datasheet/inputoutput/io_usb_micro.pdf?src-supplier=Mouser, ComponentLink9URL=https://cdn.amphenol-icc.com/media/wysiwyg/files/documentation/datasheet/inputoutput/io_usb_micro.pdf?src-supplier=Mouser, ComponentLink10Description=https://cdn.amphenol-icc.com/media/wysiwyg/files/documentation/datasheet/inputoutput/io_usb_micro.pdf?src-supplier=Allied+Electronics, ComponentLink10URL=https://cdn.amphenol-icc.com/media/wysiwyg/files/documentation/datasheet/inputoutput/io_usb_micro.pdf?src-supplier=Allied+Electronics, ComponentLink11Description=https://cdn.amphenol-icc.com/media/wysiwyg/files/documentation/datasheet/inputoutput/io_usb_micro.pdf?src-supplier=RSComponents, ComponentLink11URL=https://cdn.amphenol-icc.com/media/wysiwyg/files/documentation/datasheet/inputoutput/io_usb_micro.pdf?src-supplier=RSComponents, ComponentLink12Description=https://cdn.amphenol-icc.com/media/wysiwyg/files/documentation/datasheet/inputoutput/io_usb_micro.pdf?src-supplier=TTI, ComponentLink12URL=https://cdn.amphenol-icc.com/media/wysiwyg/files/documentation/datasheet/inputoutput/io_usb_micro.pdf?src-supplier=TTI, ComponentLink13Description=https://cdn.amphenol-icc.com/media/wysiwyg/files/documentation/datasheet/inputoutput/io_usb_micro.pdf?src-supplier=TME, ComponentLink13URL=https://cdn.amphenol-icc.com/media/wysiwyg/files/documentation/datasheet/inputoutput/io_usb_micro.pdf?src-supplier=TME, ComponentLink14Description=https://cdn.amphenol-icc.com/media/wysiwyg/files/documentation/datasheet/inputoutput/io_usb_micro.pdf?src-supplier=Heilind+Electronics, ComponentLink14URL=https://cdn.amphenol-icc.com/media/wysiwyg/files/documentation/datasheet/inputoutput/io_usb_micro.pdf?src-supplier=Heilind+Electronics, Manufacturer Part Number=10118193-0001LF, Pricing 1="1=0.44000, 10=0.41000, 25=0.36920, 50=0.32820, 100=0.31450, 250=0.28720, 500=0.27350 (USD)", RoHS=No, Stock 1=114116, Supplier 1=Digi-Key
J6 J11: library part M20-9990345, "HARWIN - M20-9990345 - Board-To-Board Connector, Straight, 2.54 mm, 3 Contacts, Header, M20 Series, Through Hole, 1 Rows", Case/Package=SIL, Color=Black, Contact Resistance=25mR, Current Rating=3A, Insulation Resistance=10GR, Manufacturer=Harwin, Max Operating Temperature=105°C, Min Operating Temperature=-40°C, Package Quantity=1000, Voltage Rating (AC)=750V, Category="Headers and Wire Housings", ComponentLink1Description=https://datasheet.ciiva.com/11747/0900766b80da602d-11747505.pdf?src-supplier=RSComponents, ComponentLink1URL=https://datasheet.ciiva.com/11747/0900766b80da602d-11747505.pdf?src-supplier=RSComponents, ComponentLink2Description=https://datasheet.ciiva.com/10151/m20-999-10151334.pdf?src-supplier=Avnet, ComponentLink2URL=https://datasheet.ciiva.com/10151/m20-999-10151334.pdf?src-supplier=Avnet, ComponentLink3Description=https://datasheet.ciiva.com/16657/m20-999-16657084.pdf?src-supplier=Avnet+Europe, ComponentLink3URL=https://datasheet.ciiva.com/16657/m20-999-16657084.pdf?src-supplier=Avnet+Europe, ComponentLink4Description=https://datasheet.ciiva.com/5160/m20-999-351179-5160492.pdf?src-supplier=Mouser, ComponentLink4URL=https://datasheet.ciiva.com/5160/m20-999-351179-5160492.pdf?src-supplier=Mouser, Connector Type="Male Pin", Contact Material=Brass,Bronze, Contact Mating Length=0.24inch, Contact Plating=Gold, Contact Type="Male Pin", Depth=2.54mm, Height=0.125inch, Housing Color=Black, Housing Material=Nylon, Length=7.62mm, Manufacturer Part Number=M20-9990345, Max Current Rating=3A, Mount="Through Hole", Number of Contacts=3, Number of Positions=3, Number of Rows=1, Orientation=Straight, Packaging=Bulk, Pitch=2.54mm, Pricing 1="1=0.19000, 10=0.17600, 100=0.10840, 500=0.08968, 1000=0.07848, 5000=0.06727, 10000=0.06540 (USD)", Radiation Hardening=No, REACH SVHC="No SVHC", RoHS=Yes, RoHS Compliant=Yes, Series=M20, Stock 1=69669, Termination=Solder, Weight=0.006138oz, Width=0.25inch
J8: library part "952-3580-ND (female header 10pin)"
J9: library part M20-7820646, "06-WAY SIL VERT SOCKET L/FREE", Case/Package=SIL, Color=Black, Contact Resistance=20mR, Manufacturer=Harwin, Max Current Rating=3A, Max Operating Temperature=105°C, Min Operating Temperature=-40°C, Package Quantity=38, Category="Headers and Wire Housings", ComponentLink1Description=http://components.arrow.com/part/dataview/0323_00725884?src-supplier=Arrow+Europe, ComponentLink1URL=http://components.arrow.com/part/dataview/0323_00725884?src-supplier=Arrow+Europe, ComponentLink2Description=http://www.harwin.com/include/downloads/pdfs/2010PAGE120.PDF?src-supplier=Avnet, ComponentLink2URL=http://www.harwin.com/include/downloads/pdfs/2010PAGE120.PDF?src-supplier=Avnet, ComponentLink3Description=https://cdn.harwin.com/pdfs/M20-782.pdf?src-supplier=Digi-Key, ComponentLink3URL=https://cdn.harwin.com/pdfs/M20-782.pdf?src-supplier=Digi-Key, ComponentLink4Description=https://cdn.harwin.com/pdfs/Harwin_PC_Connectors_M20.pdf?src-supplier=Avnet+Europe, ComponentLink4URL=https://cdn.harwin.com/pdfs/Harwin_PC_Connectors_M20.pdf?src-supplier=Avnet+Europe, ComponentLink5Description=https://cdn.harwin.com/pdfs/Harwin_PC_Connectors_M20.pdf?src-supplier=RSComponents, ComponentLink5URL=https://cdn.harwin.com/pdfs/Harwin_PC_Connectors_M20.pdf?src-supplier=RSComponents, ComponentLink6Description=https://cdn.harwin.com/pdfs/Harwin_PC_Connectors_M20.pdf?src-supplier=Mouser, ComponentLink6URL=https://cdn.harwin.com/pdfs/Harwin_PC_Connectors_M20.pdf?src-supplier=Mouser, ComponentLink7Description=https://cdn.harwin.com/pdfs/Harwin_PC_Connectors_M20.pdf?src-supplier=TTI, ComponentLink7URL=https://cdn.harwin.com/pdfs/Harwin_PC_Connectors_M20.pdf?src-supplier=TTI, Connector Type=Receptacle, Contact Gender=Female, Contact Material=Bronze, Contact Plating=Tin, Contact Type="Female Socket", Depth=2.5mm, Gender=Female, Housing Color=Black, Housing Material=Nylon, Length=15.64mm, Manufacturer Part Number=M20-7820646, Mount="Through Hole", Number of Contacts=6, Number of Positions=6, Number of Rows=1, Orientation=Straight, Packaging=Rail/Tube, Pitch=2.54mm, Pricing 1="1=1.02000, 10=0.89900, 100=0.77550, 500=0.63448, 1000=0.56398, 5000=0.49349, 10000=0.46881 (USD)", Radiation Hardening=No, RoHS=Yes, RoHS Compliant=Yes, Series=M20, Stock 1=1269, Termination=Solder
L1: library part L1210R2R2MDWIT, "FIXED IND 2.2UH 2A 80 MOHM SMD", Case Code (Imperial)=1210, Case Code (Metric)=3225, Current Rating=2A, DC Current=1.13A, DC Resistance (DCR)=80mR, Inductance=2.2uH, Inductance Tolerance=20%, Manufacturer=KEMET, Max Operating Temperature=105°C, Min Operating Temperature=-40°C, Package Quantity=1000, Resistor Type=Wirewound,Ceramic, Self Resonant Frequency=190MHz, Supplier Part Number 1=399-9598-1-ND, Test Frequency=100kHz, Case/Package=1210, Category="Fixed Inductors", ComponentLink1Description=https://datasheet.ciiva.com/4957/f3115-4957838.pdf?src-supplier=Mouser, ComponentLink1URL=https://datasheet.ciiva.com/4957/f3115-4957838.pdf?src-supplier=Mouser, ComponentLink2Description=https://datasheet.ciiva.com/6691/f3115-6691487.pdf?src-supplier=Digi-Key, ComponentLink2URL=https://datasheet.ciiva.com/6691/f3115-6691487.pdf?src-supplier=Digi-Key, ComponentLink3Description=https://datasheet.ciiva.com/8512/f3115-8512543.pdf?src-supplier=Avnet, ComponentLink3URL=https://datasheet.ciiva.com/8512/f3115-8512543.pdf?src-supplier=Avnet, ComponentLink4Description=https://datasheet.ciiva.com/17280/f3115-17280270.pdf?src-supplier=Avnet+Europe, ComponentLink4URL=https://datasheet.ciiva.com/17280/f3115-17280270.pdf?src-supplier=Avnet+Europe, ComponentLink5Description=https://datasheet.ciiva.com/22685/27262-22685038.pdf?src-supplier=Element14, ComponentLink5URL=https://datasheet.ciiva.com/22685/27262-22685038.pdf?src-supplier=Element14, Core Material=Ferrite, Depth=2.7mm, Height=2.5mm, Height - Seated (Max)=0.106inch, Length=0.126inch, Manufacturer Part Number=L1210R2R2MDWIT, Max DC Current=2A, Military Standard=Not, Mount="Surface Mount", Packaging="Tape and Reel", Pricing 1="1=0.50000, 10=0.43700, 25=0.40600, 50=0.34360, 100=0.31240, 250=0.29364, 500=0.26240 (USD)", Radiation Hardening=No, REACH SVHC="No SVHC", RoHS=Yes, RoHS Compliant=Yes, Series=L-DWI, Shielding=Unshielded, Stock 1=10603, Supplier 1=Digi-Key, Termination=SMD/SMT, Tolerance=20%, Width=0.098inch
MH1 MH2 MH3 MH4: library part mounting_holes, "Mounting hole 7.4mm diameter, 3.4 mm drill"
R1: library part AC0805FR-07100KL, "Res Thick Film 0805 100K Ohm 1% 1/8W ±100ppm/°C Molded SMD SMD Paper T/R", Case Code (Imperial)=0805, Case Code (Metric)=2012, Manufacturer=Yageo, Max Operating Temperature=155°C, Max Power Dissipation=125mW, Min Operating Temperature=-55°C, Resistance=100kR, Resistor Type="Thick Film", Supplier Part Number 1=YAG3688CT-ND, Temperature Coefficient=100ppm/°C, Tolerance=1%, Voltage Rating=150V, Case/Package=0805, Category="Chip SMD Resistors", ComponentLink1Description=http://www.mouser.com/ds/2/447/yageodocoutput-1111992.pdf?src-supplier=Mouser, ComponentLink1URL=http://www.mouser.com/ds/2/447/yageodocoutput-1111992.pdf?src-supplier=Mouser, ComponentLink2Description=http://www.yageo.com/documents/recent/PYu-AC_51_RoHS_L_2_revised.pdf?src-supplier=Future+Electronics, ComponentLink2URL=http://www.yageo.com/documents/recent/PYu-AC_51_RoHS_L_2_revised.pdf?src-supplier=Future+Electronics, ComponentLink3Description=http://www.yageo.com/NewPortal/yageodocoutput?fileName=/pdf/R-Chip/PYu-AC_51_RoHS_L_6.pdf&src-supplier=Digi-Key, ComponentLink3URL=http://www.yageo.com/NewPortal/yageodocoutput?fileName=/pdf/R-Chip/PYu-AC_51_RoHS_L_6.pdf&src-supplier=Digi-Key, ComponentLink4Description=http://www.yageo.com/documents/recent/PYu-AC_51_RoHS_L_2_revised.pdf?src-supplier=Avnet+Europe, ComponentLink4URL=http://www.yageo.com/documents/recent/PYu-AC_51_RoHS_L_2_revised.pdf?src-supplier=Avnet+Europe, Contact Plating=Tin,Matte, Features="Moisture Resistant,Automotive AEC-Q200", Height=0.024inch, Lead Free="Lead Free", Length=0.079inch, Manufacturer Part Number=AC0805FR-07100KL, Number of Terminations=2, Packaging="Tape and Reel", Power Rating=125mW, Pricing 1="1=0.10000, 10=0.05000, 100=0.02040, 1000=0.00917, 2500=0.00796 (USD)", Radiation Hardening=No, RoHS=Yes, RoHS Compliant=Yes, Series=AC, Size Code=0805, Stock 1=9600, Supplier 1=Digi-Key, Termination=SMD/SMT, Width=0.049inch
R2 R3 R16 R17 R25: library part RT0805FRE07560RL, "RES SMD 560 OHM 1% 1/8W 0805", Case Code (Imperial)=0805, Case Code (Metric)=2012, Manufacturer=Yageo, Max Operating Temperature=125°C, Max Power Dissipation=125mW, Min Operating Temperature=-55°C, Package Quantity=5000, Resistance=560R, Resistance Tolerance=1%, Resistor Type="Thin Film", Supplier Part Number 1=13-RT0805FRE07560RLCT-ND, Temperature Coefficient=50ppm/°C, Voltage Rating=150V, Case/Package=0805, Category="Chip SMD Resistors", ComponentLink1Description=https://datasheet.ciiva.com/12834/pyu-rt-1-to-0-05-rohs-l-4-12834166.pdf?src-supplier=Mouser, ComponentLink1URL=https://datasheet.ciiva.com/12834/pyu-rt-1-to-0-05-rohs-l-4-12834166.pdf?src-supplier=Mouser, ComponentLink2Description=https://datasheet.ciiva.com/2561/pyu-rt-1-to-0-05-rohs-l-5-2561303.pdf?src-supplier=Digi-Key, ComponentLink2URL=https://datasheet.ciiva.com/2561/pyu-rt-1-to-0-05-rohs-l-5-2561303.pdf?src-supplier=Digi-Key, ComponentLink3Description=https://datasheet.ciiva.com/7942/1392914-7942159.pdf?src-supplier=Element14, ComponentLink3URL=https://datasheet.ciiva.com/7942/1392914-7942159.pdf?src-supplier=Element14, Construction=Rectangular, Contact Plating=Tin,Matte, Depth=1.25mm, Height=0.024inch, Lead Free="Lead Free", Length=2mm, Manufacturer Part Number=RT0805FRE07560RL, Military Standard=Not, Number of Pins=2, Number of Terminations=2, Packaging="Tape and Reel", Power Rating=125mW, Pricing 1="1=0.10000, 10=0.08000, 100=0.03100, 1000=0.01362, 2500=0.01176 (USD)", Radiation Hardening=No, REACH SVHC="No SVHC", RoHS=Yes, RoHS Compliant=Yes, Series=RT, Stock 1=4891, Supplier 1=Digi-Key, Termination=SMD/SMT, Tolerance=1%, Voltage Rating (DC)=150V, Width=1.25mm
R4 R15 R21 R22 R23 R24: library part AC0805FR-0710KL, "RES SMD 10K OHM 1% 1/8W 0805", Case Code (Imperial)=0805, Case Code (Metric)=2012, Manufacturer=Yageo, Max Operating Temperature=155°C, Max Power Dissipation=125mW, Min Operating Temperature=-55°C, Package Quantity=1, Resistance=10kR, Resistor Type="Thick Film", Supplier Part Number 1=311-10KLGCT-ND, Temperature Coefficient=100ppm/°C, Tolerance=1%, Voltage Rating=150V, Case/Package=0805, Category="Chip SMD Resistors", ComponentLink1Description=https://datasheet.ciiva.com/5558/pyu-ac-51-rohs-l-2-5558347.pdf?src-supplier=Mouser, ComponentLink1URL=https://datasheet.ciiva.com/5558/pyu-ac-51-rohs-l-2-5558347.pdf?src-supplier=Mouser, Construction=Rectangular, Depth=1.25mm, Features="Moisture Resistant,Automotive AEC-Q200,Anti-Sulfur", Height=0.024inch, Lead Free="Lead Free", Length=0.079inch, Manufacturer Part Number=AC0805FR-0710KL, Military Standard=Not, Number of Terminations=2, Packaging="Tape and Reel", Power Rating=125mW, Pricing 1="1=0.10000, 10=0.05000, 100=0.02040, 1000=0.00917, 2500=0.00796 (USD)", RoHS=Yes, RoHS Compliant=Yes, Series=AC, Size Code=0805, Stock 1=68371, Supplier 1=Digi-Key, Termination=SMD/SMT, Width=0.049inch
R5 R20: library part RMCF0805FG1M00, Package=None, Supplier Part Number 1=RMCF0805FG1M00CT-ND, Availability=Unavailable, MP=RMCF0805FG1M00, Price=None, Supplier 1=Digi-Key